# Altium PCB PCB1.PcbDoc
Units mm, origin at the board's own origin, x right, y up, seen from the top; angles counter-clockwise.
Board outline 57.66 x 31.37 mm, 2 copper layers (Top Layer, Bottom Layer), stack 0.325 mm thick; 22 components, 28 nets, 108 pads, 0 vias.
Unrouted connection lines stored in the file: 12.
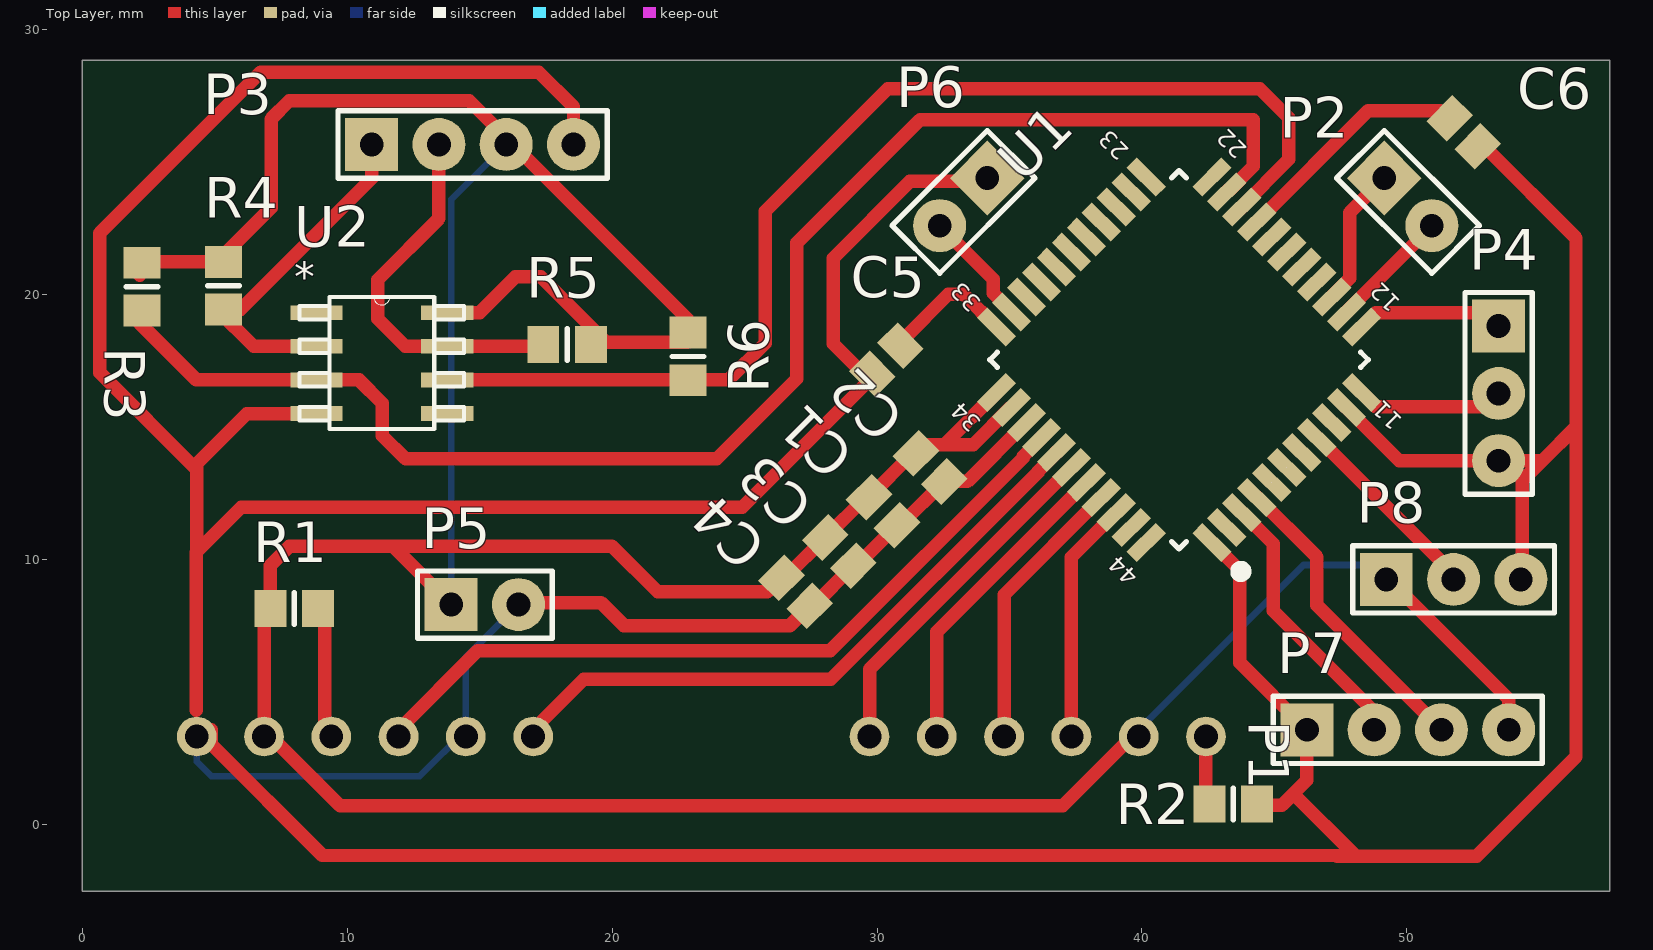
[diagram p0: Top Layer view]
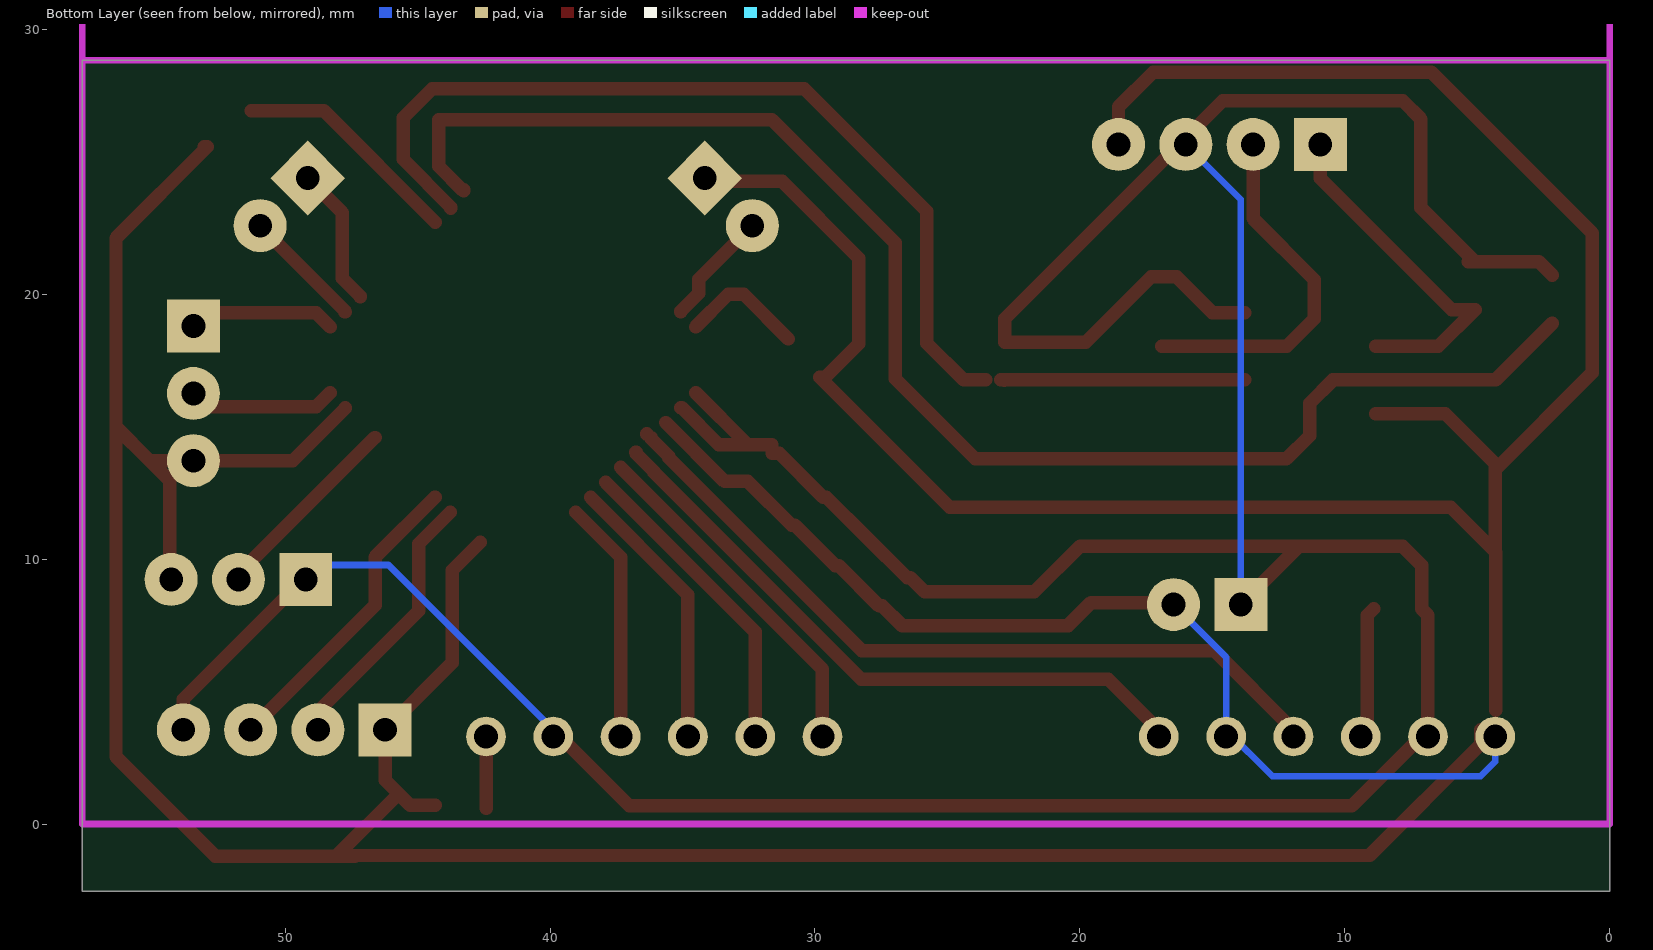
[diagram p1: Bottom Layer view, seen from below]

## Layer stack, top to bottom
Top Layer: signal copper 0.0356
Dielectric 1: core 0.254, FR-4, Dk 4.2
Bottom Layer: signal copper 0.0356
Bottom Solder: solder mask 0.0102, Solder Resist, Dk 3.5

## Board outline
0,-2.54 0,28.829 57.658,28.829 57.658,-2.54

## Design rules (kind name [scope] priority, off if disabled: settings)
Clearance [All] p1: gap=0.254
PolygonConnect [All] p1: connectstyle=Relief reliefconductorwidth=0.254 reliefentries=4 polygonreliefangle="90 Angle" airgapwidth=0.254
RoomDefinition finalproy [InComponentClass('finalproy')] p1: confinementstyle=ConfineIn formatcopy=TRUE lockcomponents=FALSE outline -72.009,-59.69 -21.209,-59.69 -21.209,-34.29 -72.009,-34.29
RoutingVias [All] p1: holewidth=0.711 width=1.27 viastyle="Through Hole" minholewidth=0.711 minwidth=1.27 maxholewidth=0.711 maxwidth=1.27
SolderMaskExpansion [All] p1: expansion=0.102
Width [All] p1: maxlimit=1.016 minlimit=0.254 preferedwidth=0.508 bottomlayer_maxwidth=0.254 bottomlayer_prefwidth=0.254 minimp=50.000000 maximp=50.000000 favimp=50.000000
30 further rules are at their usual default settings.

## Components (designator, comment, footprint, x,y, rotation, side; value= is the part's Value field where it differs from the comment)
C1 "Cap Pol3" C0805 30.226,11.811 r315 top
C2 "Cap Pol3" C0805 32.004,13.462 r315 top
C3 "Cap Pol3" C0805 28.575,10.287 r315 top
C4 "Cap Pol3" C0805 26.924,8.763 r315 top
C5 "Cap Pol3" C0805 30.353,17.526 r225 top
C6 "Cap Pol3" C0805 52.146,26.111 r315 top
P1 "Connector" "LCD 16x2" 4.318,3.302 r0 top
P2 "PRG" HDR1X2 49.149,24.384 r315 top
P3 "I2C" HDR1X4 10.922,25.654 r0 top
P4 "UART" HDR1X3 53.467,18.796 r270 top
P5 "FT" HDR1X2 13.925,8.285 r0 top
P6 "PRG2" HDR1X2 34.163,24.384 r225 top
P7 "HC" HDR1X4 46.228,3.556 r0 top
P8 "LM" HDR1X3 49.225,9.235 r0 top
R1 "Res Varistor" 6-0805_N 8.001,8.128 r180 top
R2 "Res Varistor" 6-0805_N 43.45,0.76 r180 top
R3 "Res Varistor" 6-0805_N 2.25,20.285 r90 top
R4 "Res Varistor" 6-0805_N 5.334,20.32 r90 top
R5 "Res Varistor" 6-0805_N 18.3,18.11 r0 top
R6 "Res Varistor" 6-0805_N 22.86,17.653 r90 top
U1 "CY8C4245AXI-483" TQFP80P1200X1200X160-44N 41.402,17.526 r135 top
U2 "P82B715_D_8" D8 11.303,17.399 r0 top

## Footprints (in the part's own frame and the unit in brackets; to place one, negate y for a bottom-side part, rotate by r counter-clockwise, add the part's x,y. Pads: shape width x height; smd on the part's side, far side on the other; paste and mask are expansions set on the pad)
6-0805_N [mm] "Chip Resistor, Body 2.0x1.2mm, IPC Medium Density"
  rect 1.2x1.4 smd: 1(-0.9,0) 2(0.9,0)
  silkscreen extent 0,-0.6 0,0.6, body extent -1.07,-0.7 1.07,0.7, height 0.7
C0805 [mm] "Chip Capacitor, Body 2.0x1.3mm, IPC High Density"
  rect 1.1x1.4 smd: 1(-0.75,0) 2(0.75,0)
  body extent -1.1,-0.73 1.1,0.73, height 1.4
D8 [mil]
  rect 78x22 smd: 1(-97,75) 2(-97,25) 3(-97,-25) 4(-97,-75) 5(97,-75) 6(97,-25) 7(97,25) 8(97,75)
  silkscreen extent -122,-98 122,99
HDR1X2 [mm] "Connector; Header; 2 Position"
  rect 2x2 hole 0.9: 1(0,0)
  round 2 hole 0.9: 2(2.54,0)
  silkscreen extent -1.27,-1.27 3.81,1.27
HDR1X3 [mm] "Connector; Header; 3 Position"
  rect 2x2 hole 0.9: 1(0,0)
  round 2 hole 0.9: 2(2.54,0) 3(5.08,0)
  silkscreen extent -1.27,-1.27 6.35,1.27
HDR1X4 [mm] "Connector; Header; 4 Position"
  rect 2x2 hole 0.9: 1(0,0)
  round 2 hole 0.9: 2(2.54,0) 3(5.08,0) 4(7.62,0)
  silkscreen extent -1.27,-1.27 8.89,1.27
"LCD 16x2" [mm]
  round 1.5 hole 0.9: 1(0,0) 2(2.54,0) 3(5.08,0) 4(7.62,0) 5(10.16,0) 6(12.7,0) 11(25.4,0) 12(27.94,0) 13(30.48,0) 14(33.02,0) 15(35.56,0) 16(38.1,0)
TQFP80P1200X1200X160-44N [mm]
  rect 1.55x0.55 smd mask+0: 1(-5.75,4) 2(-5.75,3.2) 3(-5.75,2.4) 4(-5.75,1.6) 5(-5.75,0.8) 6(-5.75,0) 7(-5.75,-0.8) 8(-5.75,-1.6) 9(-5.75,-2.4) 10(-5.75,-3.2) 11(-5.75,-4) 23(5.75,-4) 24(5.75,-3.2) 25(5.75,-2.4) 26(5.75,-1.6) 27(5.75,-0.8) 28(5.75,0) 29(5.75,0.8) 30(5.75,1.6) 31(5.75,2.4) 32(5.75,3.2) 33(5.75,4)
  rect 0.55x1.55 smd mask+0: 12(-4,-5.75) 13(-3.2,-5.75) 14(-2.4,-5.75) 15(-1.6,-5.75) 16(-0.8,-5.75) 17(0,-5.75) 18(0.8,-5.75) 19(1.6,-5.75) 20(2.4,-5.75) 21(3.2,-5.75) 22(4,-5.75) 34(4,5.75) 35(3.2,5.75) 36(2.4,5.75) 37(1.6,5.75) 38(0.8,5.75) 39(0,5.75) 40(-0.8,5.75) 41(-1.6,5.75) 42(-2.4,5.75) 43(-3.2,5.75) 44(-4,5.75)
  silkscreen extent -7.5,-5.05 5.05,5.05, body extent -5.05,-5.05 5.05,5.05, height 1.6

## Part data
C1 C2 C3 C4 C5 C6: "Polarized Capacitor (Surface Mount)"
P1: library part "Header 1x16"
P2 P5 P6: library part "Header 2", "Header, 2-Pin"
P3 P7: library part "Header 4", "Header, 4-Pin"
P4 P8: library part "Header 3", "Header, 3-Pin"
R1 R2 R3 R4 R5 R6: "Varistor (Voltage-Sensitive Resistor)"

## Nets (pads, with @x,y where several pads share a name; then routed paths per layer and width w, separated by ;. In a path a pad name is that pad's centre, name@x,y a point inside that pad or via, vN(x,y) a via of type N, cw(c..) or ccw(c..) an arc to the next point about the centre after c; other vN are vias at no path point)
D0: 
D1: 
D2: 
D3: 
D4: P1.6 U1.39 | length 13.1
  Top Layer w0.508: 29.718,3.556 29.718,5.842 U1.39
D5: P1.5 U1.40 | length 11.7
  Top Layer w0.508: 32.258,3.556 32.258,7.251 U1.40
D6: P1.4 U1.41 | length 10.3
  Top Layer w0.508: 34.798,3.556 34.798,8.659 U1.41
D7: P1.3 U1.42 | length 8.9
  Top Layer w0.508: 37.338,3.556 37.338,10.068 U1.42
E: P1.11 U1.38 | length 24.1
  Top Layer w0.508: 17.018,3.556 18.923,5.461 28.259,5.461 36.086,13.287 36.086,13.317 36.746,13.978 36.746,14.026 U1.38
ECHO: P7.2 U1.3 | length 10.3
  Top Layer w0.508: U1.3 44.958,10.576 44.958,8.052 48.768,4.242 P7.2
GND: C1.2 C2.2 C3.2 C4.2 C5.2 C6.2 P1.12 P1.16 P3.4 P4.3 P5.2 P6.1 P7.1 P8.3 R2.1 U1.1 U1.10 U1.36 U2.4 | length 239.7
  Top Layer w0.508: 4.3,4.295 4.3,10.26 4.318,10.278 ; 4.864,3.556 4.864,3.01 9.064,-1.19 48.053,-1.19 45.72,1.143 ; U2.4 6.209,15.494 4.318,13.603 4.318,13.376 ; P5.2@16.637,8.36 19.58,8.36 20.447,7.493 26.715,7.493 C4.2 27.581,8.233 C3.2 29.232,9.757 C1.2 30.883,11.281 C2.2 33.414,12.932 U1.36 ; P3.4 18.542,27.074 17.231,28.385 6.725,28.385 0.65,22.31 0.65,17.044 4.318,13.376 ; P6.1@33.782,24.003 P6.1@34.036,24.257 ; P6.1 P6.1@34.036,24.257 ; U1.1 43.688,9.583 43.688,6.096 P7.1 46.228,1.651 45.287,0.71 R2.1@44.334,0.71 ; 47.371,-1.215 52.633,-1.215 56.388,2.54 56.388,14.986 ; U1.10 47.731,15.699 49.713,13.716 P4.3 55.106,13.716 54.356,12.966 P8.3@54.356,9.779 ; C6.2@53.05,25.568 52.942,25.568 56.388,22.122 56.388,14.986 ; 55.118,13.716 56.388,14.986 ; 4.318,10.278 6,11.96 24.914,11.96 29.823,16.869 29.613,16.869 28.348,18.134 28.348,21.363 31.242,24.257 P6.1@34.036,24.257 ; 4.318,10.278 4.318,13.376
  Bottom Layer w0.254: 4.318,3.556 4.318,2.353 4.868,1.803 12.725,1.803 14.478,3.556 14.478,6.298 P5.2
LCL: P3.2 R5.1 U2.7 | length 13.7
  Top Layer w0.508: P3.2 13.462,22.86 11.15,20.548 11.15,19.076 12.192,18.034 U2.7 R5.1@16.916,18.034
LDA: P3.1 R4.1 U2.2 | length 13.5
  Top Layer w0.508: U2.2 6.466,18.034 5.08,19.42 5.958,19.42 10.922,24.384 P3.1
NetC5_1: C5.1 U1.33 | length 4.7
  Top Layer w0.508: C5.1@31.01,18.31 32.694,19.994 33.277,19.994 U1.33
NetC6_1: C6.1 U1.19 | length 8.7
  Top Layer w0.508: U1.19 48.548,26.935 C6.1@51.274,26.935
NetP1_1: P1.1 R2.2 | length 3
  Top Layer w0.508: R2.2@42.418,0.585 42.418,2.921 42.418,3.556
NetP1_14: P1.14 R1.1 | length 4.8
  Top Layer w0.508: R1.1 9.15,7.879 9.15,3.804 9.398,3.556
OUT: P8.2 U1.8 | length 7.2
  Top Layer w0.508: U1.8 46.623,14.591 51.436,9.779 P8.2@51.816,9.779
RS: P1.13 U1.37 | length 28.9
  Top Layer w0.508: 11.938,3.556 14.917,6.535 28.226,6.535 35.52,13.829 35.52,13.883 36.181,14.543 36.181,14.591 U1.37 ; U1.37@36.343,14.707 U1.37@36.343,14.731
RX: P4.2 U1.11 | length 5.2
  Top Layer w0.508: U1.11 48.837,15.748 52.959,15.748 P4.2@53.213,16.002
SCL: R6.1 U1.20 U2.6 | length 43.4
  Top Layer w0.508: U2.6 R6.1@22.871,16.764 ; R6.1 R6.1@22.871,16.764 ; R6.1@22.987,16.764 R6.1@22.871,16.764 ; R6.1@23.552,16.764 24.384,16.764 25.775,18.155 25.775,23.135 30.4,27.76 44.45,27.76 45.55,26.66 45.55,25.092 U1.20@43.747,23.289 ; U1.20@43.747,23.241 U1.20@43.747,23.289 ; U1.20 U1.20@43.747,23.289
SDA: R3.1 U1.21 U2.3 | length 56.3
  Top Layer w0.508: R3.1@2.159,18.912 4.307,16.764 U2.3 10.446,16.764 11.325,15.885 11.325,14.66 12.2,13.785 23.945,13.785 26.975,16.815 26.975,21.935 31.625,26.585 44.2,26.585 44.2,24.825 43.31,23.936 43.262,23.936 U1.21@43.262,23.912
SWDCLK: P2.1 U1.14 | length 5.3
  Top Layer w0.508: U1.14 47.165,19.919 47.85,20.604 47.85,23.085 P2.1
SWDIO: P2.2 U1.13 | length 4.6
  Top Layer w0.508: U1.13 47.755,19.329 47.755,19.377 50.945,22.568 P2.2
TRIG: P7.3 U1.4 | length 11.7
  Top Layer w0.508: U1.4 44.361,12.329 46.609,10.08 46.609,8.255 P7.3
TX: P4.1 U1.12 | length 5.6
  Top Layer w0.508: U1.12 48.837,19.304 52.959,19.304 P4.1
VCC: C1.1 C2.1 C3.1 C4.1 P1.2 P1.15 P3.3 P5.1 P7.4 P8.1 R1.2 R3.2 R4.2 R5.2 R6.2 U1.34 U1.35 U2.8 | length 158
  Top Layer w0.508: R3.2@2.159,20.712 2.667,21.22 R4.2@5.08,21.22 ; R4.2 R4.2@5.08,21.22 ; P5.1@13.454,8.755 11.725,10.485 ; U2.8 14.994,19.304 16.35,20.66 17.302,20.66 19.777,18.185 22.838,18.185 22.838,19.072 P3.3@16.002,25.908 ; P3.3 P3.3@16.002,25.908 ; C4.1 25.863,8.763 21.717,8.763 19.995,10.485 11.725,10.485 ; C4.1@26.521,9.293 C3.1 29.569,12.341 C1.1 31.347,13.992 C2.1 31.623,13.992 31.623,14.324 32.543,14.324 ; U1.34 32.543,14.324 ; U1.35 35.027,15.723 33.628,14.324 32.543,14.324 ; P1.15@39.878,3.556 37.007,0.685 9.729,0.685 6.858,3.556 6.858,7.885 R1.2 7.101,9.768 7.818,10.485 11.725,10.485 ; P8.1@49.276,9.779 49.276,9.284 53.848,4.712 P7.4 ; R4.2@5.08,21.22 7.124,23.264 7.124,26.614 7.815,27.305 14.605,27.305 P3.3@16.002,25.908
  Bottom Layer w0.254: P5.1 13.925,23.577 P3.3 ; P1.15@39.878,3.556 46.101,9.779 P8.1@49.276,9.779
XRES: P6.2 U1.32 | length 4.4
  Top Layer w0.508: P6.2 34.389,20.566 34.389,20.038 35.073,19.353 U1.32
pads on no net: U1.2 U1.5 U1.6 U1.7 U1.9 U1.15 U1.16 U1.17 U1.18 U1.22 U1.23 U1.24 U1.25 U1.26 U1.27 U1.28 U1.29 U1.30 U1.31 U1.43 U1.44 U2.1 U2.5
copper on no net: | length 1.3
  Top Layer w0.254: 4.125,3.66 4.229,3.556
  Top Layer w0.508: 135.382,-33.274 135.382,-32.512 135.636,-32.258

## Keep-outs
Bottom Layer:
  lines w0.254: 0,28.829 57.658,28.829 ; 0,31.369 0,0 57.658,0 57.658,31.369

## Text inside footprints (layer, text, board x,y; h text height)
U1: Top Overlay "44" at 39.917,9.394 h0.65 r135; Top Overlay "34" at 33.977,15.193 h0.65 r135; Top Overlay "33" at 33.977,19.718 h0.65 r135; Top Overlay "23" at 39.564,25.446 h0.65 r135; Top Overlay "22" at 44.018,25.516 h0.65 r135; Top Overlay "12" at 49.817,19.718 h0.65 r135; Top Overlay "11" at 49.887,15.263 h0.65 r135
U2: Top Overlay "*" at 8.001,19.736 h1.97; Mechanical 16 "*" at 8.001,19.736 h1.97